# EAGLE board displayPCB (EAGLE 7.4.0)
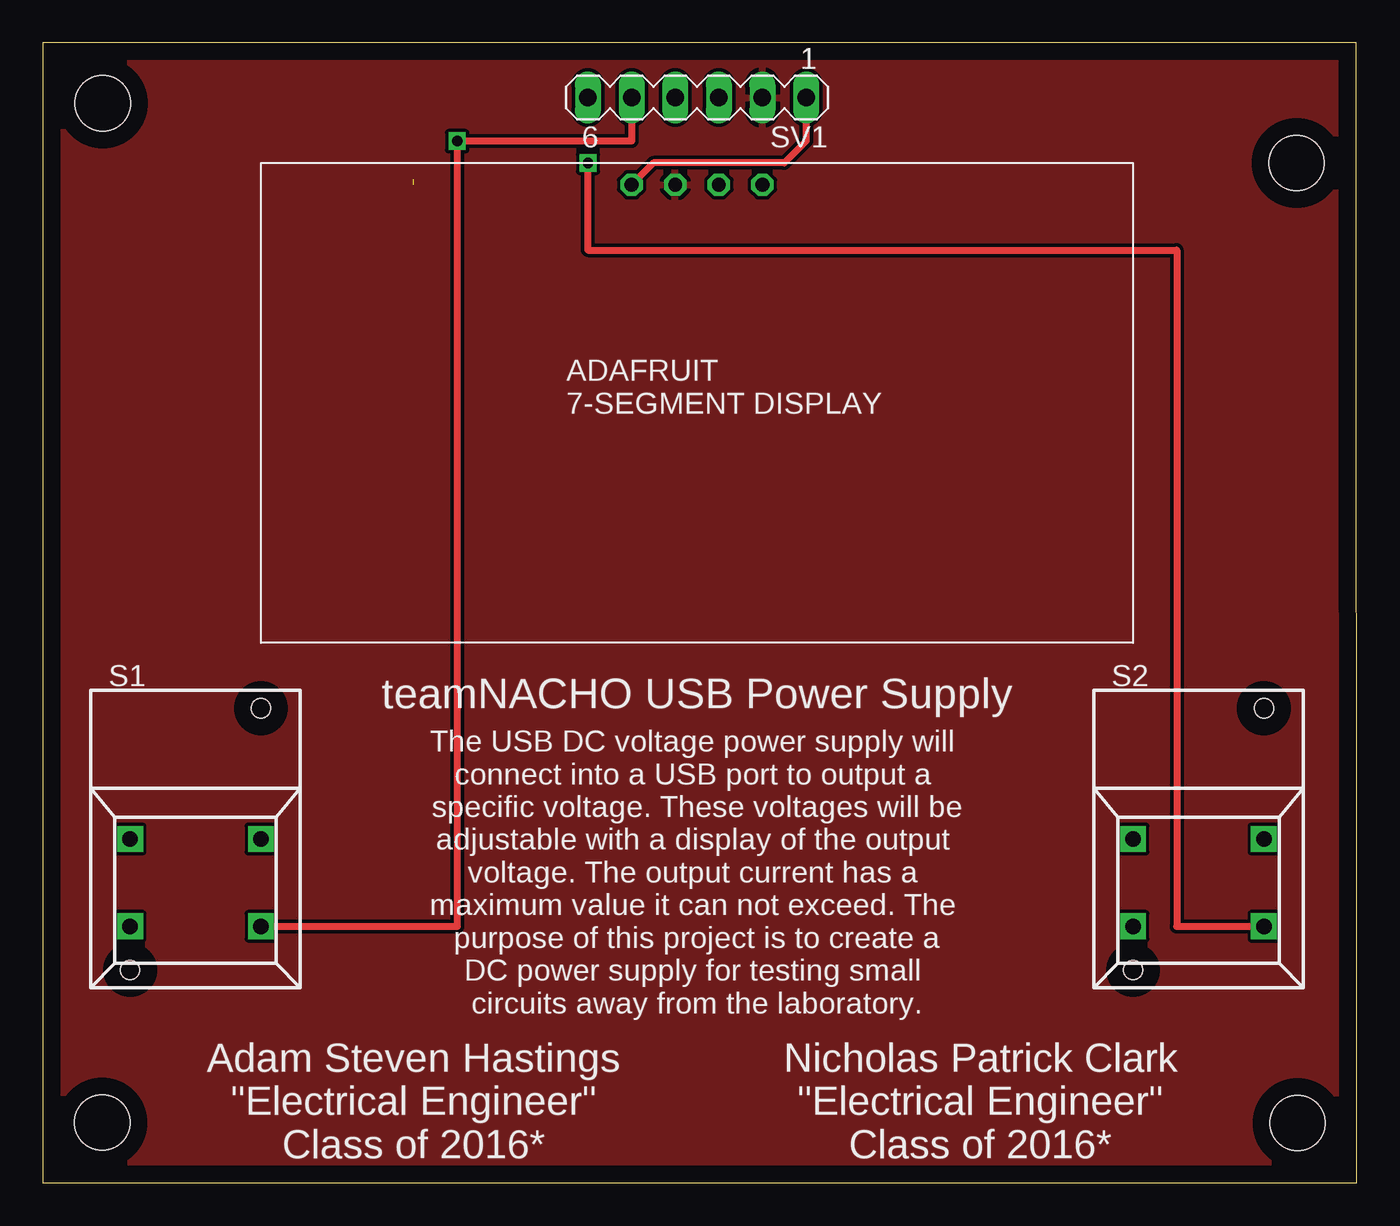
[diagram p0: board, top side]
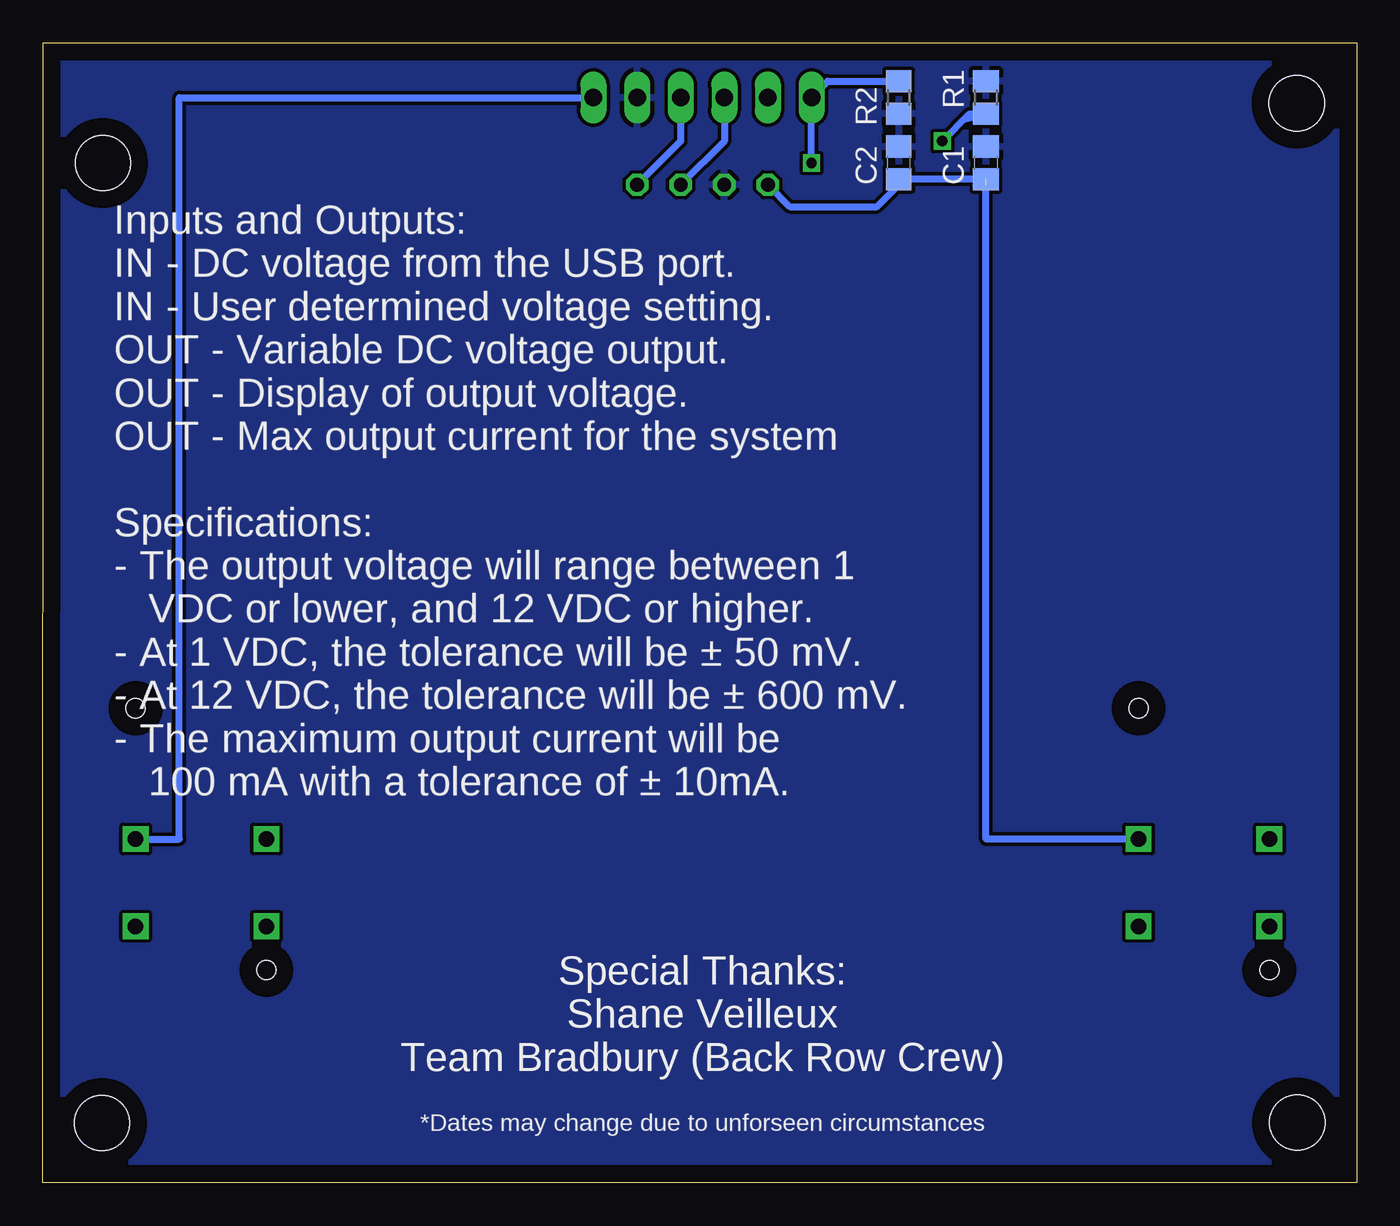
[diagram p1: board, bottom side, seen from below]

Size 76.52 x 66.36 mm. Coordinates in mm from the lower left corner, seen from the top.
Outline: 0,0 76.52,0 76.49,66.36 0,66.36 0,0
Copper layers (1*16): Top 0.035mm / dielectric 1.5mm / Bottom 0.035mm
Design rules "default": minimum track width 10mil, minimum drill 24mil, track to track 8mil, track to pad 8mil, pad to pad 8mil, via to via 8mil, smd to smd 8mil, copper to edge 40mil, drill to drill 8mil, minimum pad ring 10mil, minimum via ring 8mil, stop-mask expansion 4mil, vias tented up to drill 0mil, thermal gap 10mil
Holes 3.2 mm at 3.45,3.49 3.48,62.85 73.03,59.37 73.08,3.47

## Footprints (pad centres in the part's own frame; a part is rotated, then mirrored left to right if it is on the bottom)
C0805 = smd 1.3 x 1.5: 1 -0.95,0; 2 0.95,0
R0805 = smd 1.3 x 1.5: 1 -0.95,0; 2 0.95,0
5501 = drill 0.9 pad 1.5 square: 1A 0,3.81; 1B 0,-3.81; NC 5.08,-3.81; NO 5.08,3.81 | hole 1.1: -7.62,3.81; 7.62,-3.81
MA06-1 = drill 1.016 long: 1 -6.35,0; 2 -3.81,0; 3 -1.27,0; 4 1.27,0; 5 3.81,0; 6 6.35,0
AFDISPLAY = drill 0.8 octagon: + 21.59,26.67; - 24.13,26.67; C 29.21,26.67; D 26.67,26.67

## Placement (x,y rotation side)
C1  10u  [C0805]  21.59,59.37 90 bottom
C2  0.1u  [C0805]  26.67,59.37 90 bottom
R1  1k  [R0805]  21.59,63.18 90 bottom
R2  1k  [R0805]  26.67,63.18 270 bottom
S1  5501  [5501]  8.89,20 270 top
S2  5501  [5501]  67.31,20 270 top
SV1  [MA06-1]  38.1,63.18 180 top
U$1  AFDISPLAY  [AFDISPLAY]  12.7,31.43 0 top

## Library data of the parts
C1 C2 R1 R2 = rcl
S1 S2 = switch
SV1 = con-lstb; OC_FARNELL: unknown; OC_NEWARK: unknown
U$1 = AFdisplay

## Nets
+5V: C1.1 C2.1 S1.1A S2.1A SV1.1 U$1.+
GND: C1.2 C2.2 R1.2 R2.2 SV1.2 U$1.-
N$3: SV1.3 U$1.C
N$4: SV1.4 U$1.D
N$5: R1.1 S1.NO SV1.5
N$6: R2.1 S2.NO SV1.6

## Tracks (layer width: path | path; a pad name or v marks a point on that pad's centre or on a via)
+5V  (1 unrouted)
  Top 0.406: SV1.1 44.45,60.64 43.18,59.37 35.56,59.37 U$1.+
  Bottom 0.406: C1.1 C2.1 26.67,58.1 27.94,56.83 33.02,56.83 U$1.+ | S1.1A 21.59,20 21.59,58.1 | S2.1A 68.58,20 68.58,63.18 SV1.1
GND
  pour Top: -1.27,66.99 77.47,66.99 77.47,37.78 77.47,-1.59 -1.27,-1.59
  pour Bottom: 0,66.99 77.47,66.99 77.47,-0.32 -1.27,-0.32 -1.27,66.99
N$3
  Bottom 0.406: SV1.3 39.37,60.64 U$1.C
N$4
  Bottom 0.406: SV1.4 36.83,60.64 U$1.D
N$5  (via drill 0.6)
  Top 0.406: SV1.5 34.29,60.64 v24.13,60.64 24.13,14.92 S1.NO
  Bottom 0.406: 22.86,61.91 R1.1 22.54,62.23 v24.13,60.64
N$6  (via drill 0.6)
  Top 0.406: v31.75,59.37 31.75,54.29 66.04,54.29 66.04,14.92 S2.NO
  Bottom 0.406: R2.1 30.8,64.13 SV1.6 v31.75,59.37

## Text on the board
tPlace: teamNACHO USB Power Supply | The USB DC voltage power supply will / connect into a USB port to output a / specific voltage. These voltages will be / adjustable with a display of the output / voltage. The output current has a / maximum value it can not exceed. The / purpose of this project is to create a / DC power supply for testing small / circuits away from the laboratory. | Adam Steven Hastings / "Electrical Engineer" / Class of 2016* | Nicholas Patrick Clark / "Electrical Engineer" / Class of 2016*
bPlace: Inputs and Outputs: / IN - DC voltage from the USB port. / IN - User determined voltage setting. / OUT - Variable DC voltage output. / OUT - Display of output voltage. / OUT - Max output current for the system / / Specifications: / - The output voltage will range between 1 / VDC or lower, and 12 VDC or higher. / - At 1 VDC, the tolerance will be ± 50 mV. / - At 12 VDC, the tolerance will be ± 600 mV. / - The maximum output current will be / 100 mA with a tolerance of ± 10mA. | Special Thanks: / Shane Veilleux / Team Bradbury (Back Row Crew) | *Dates may change due to unforseen circumstances